# Altium PCB PenguinPi.PcbDoc
Units mil, origin at the board's own origin, x right, y up, seen from the top; angles counter-clockwise.
Board outline 2559.11 x 3103.94 mil, 2 copper layers (Top Layer, Bottom Layer); 57 components, 63 nets, 260 pads, 67 vias.
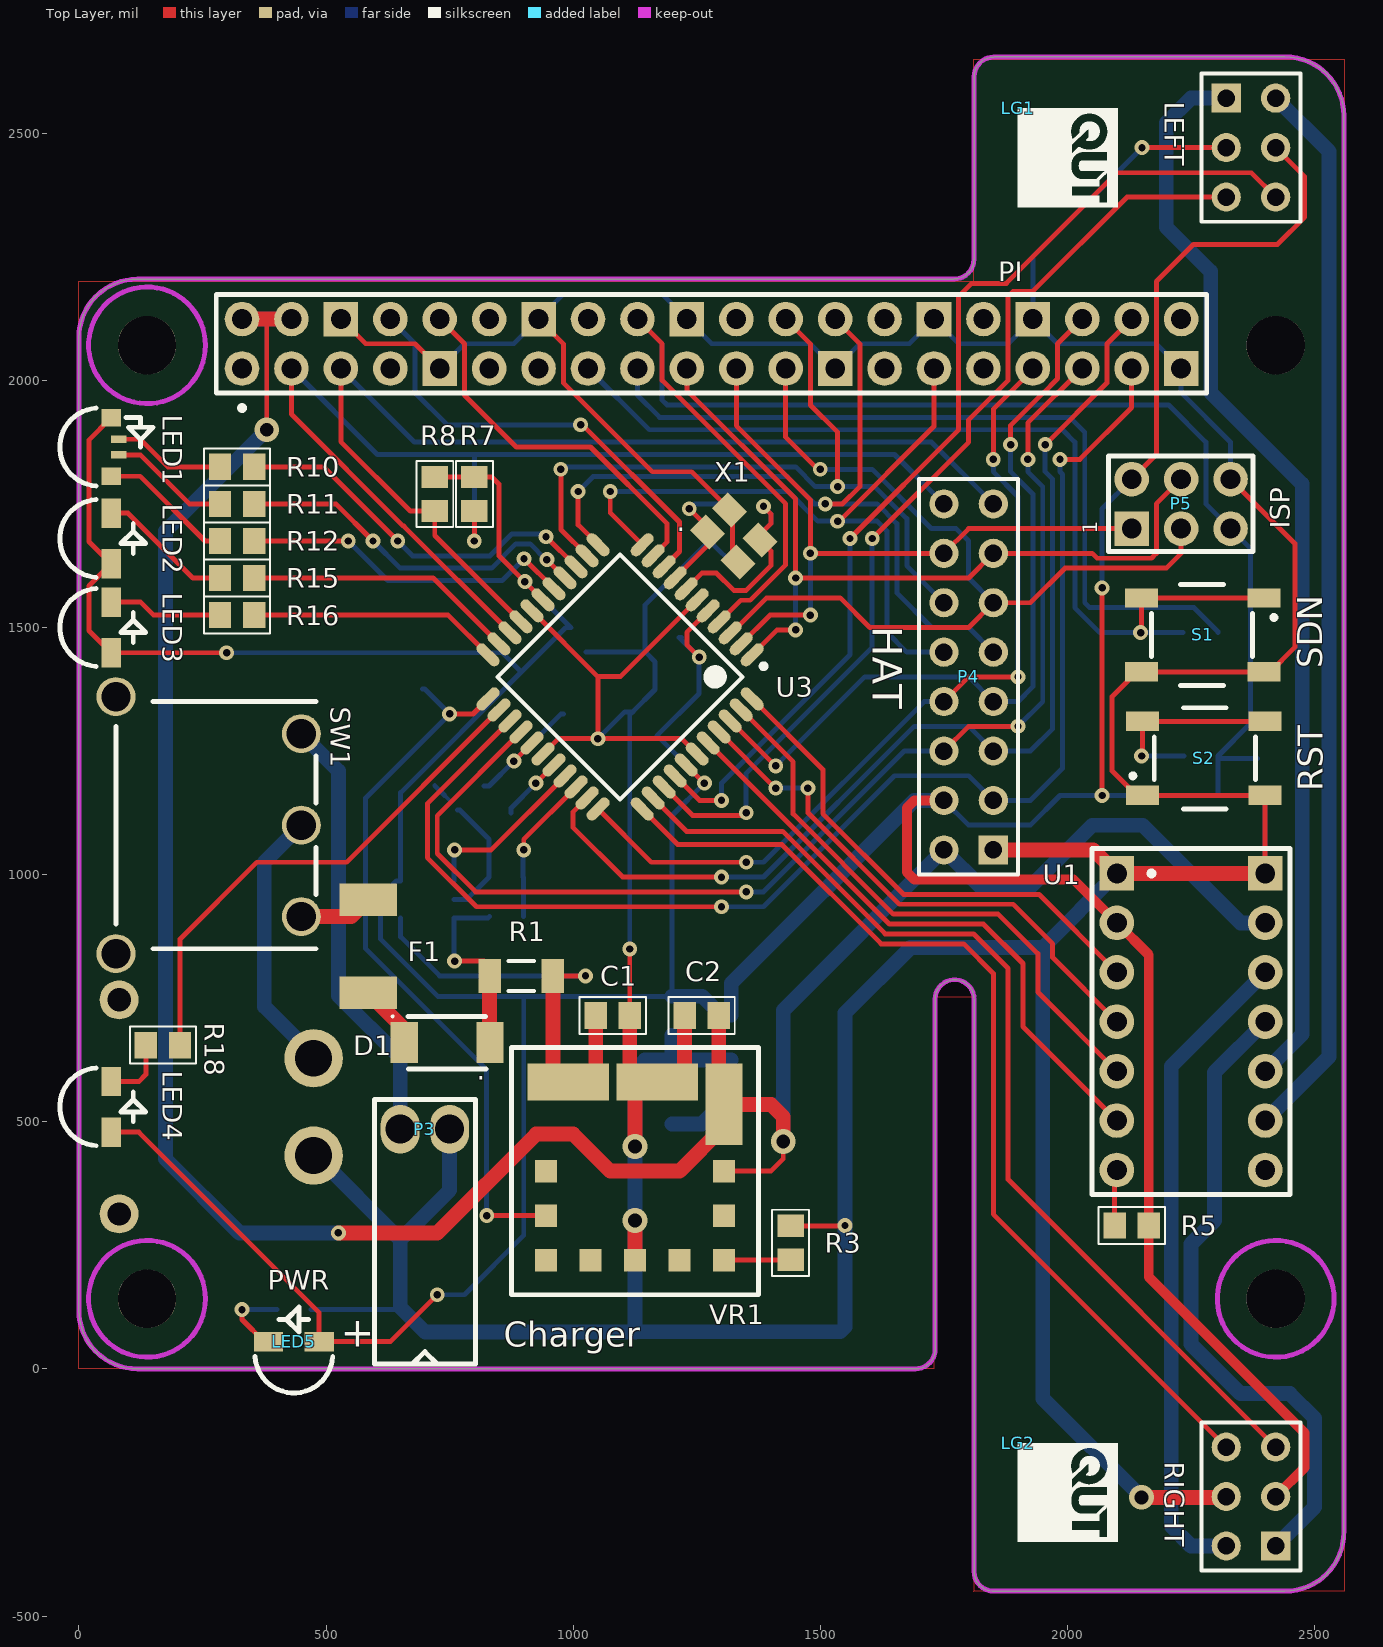
[diagram p0: Top Layer view]
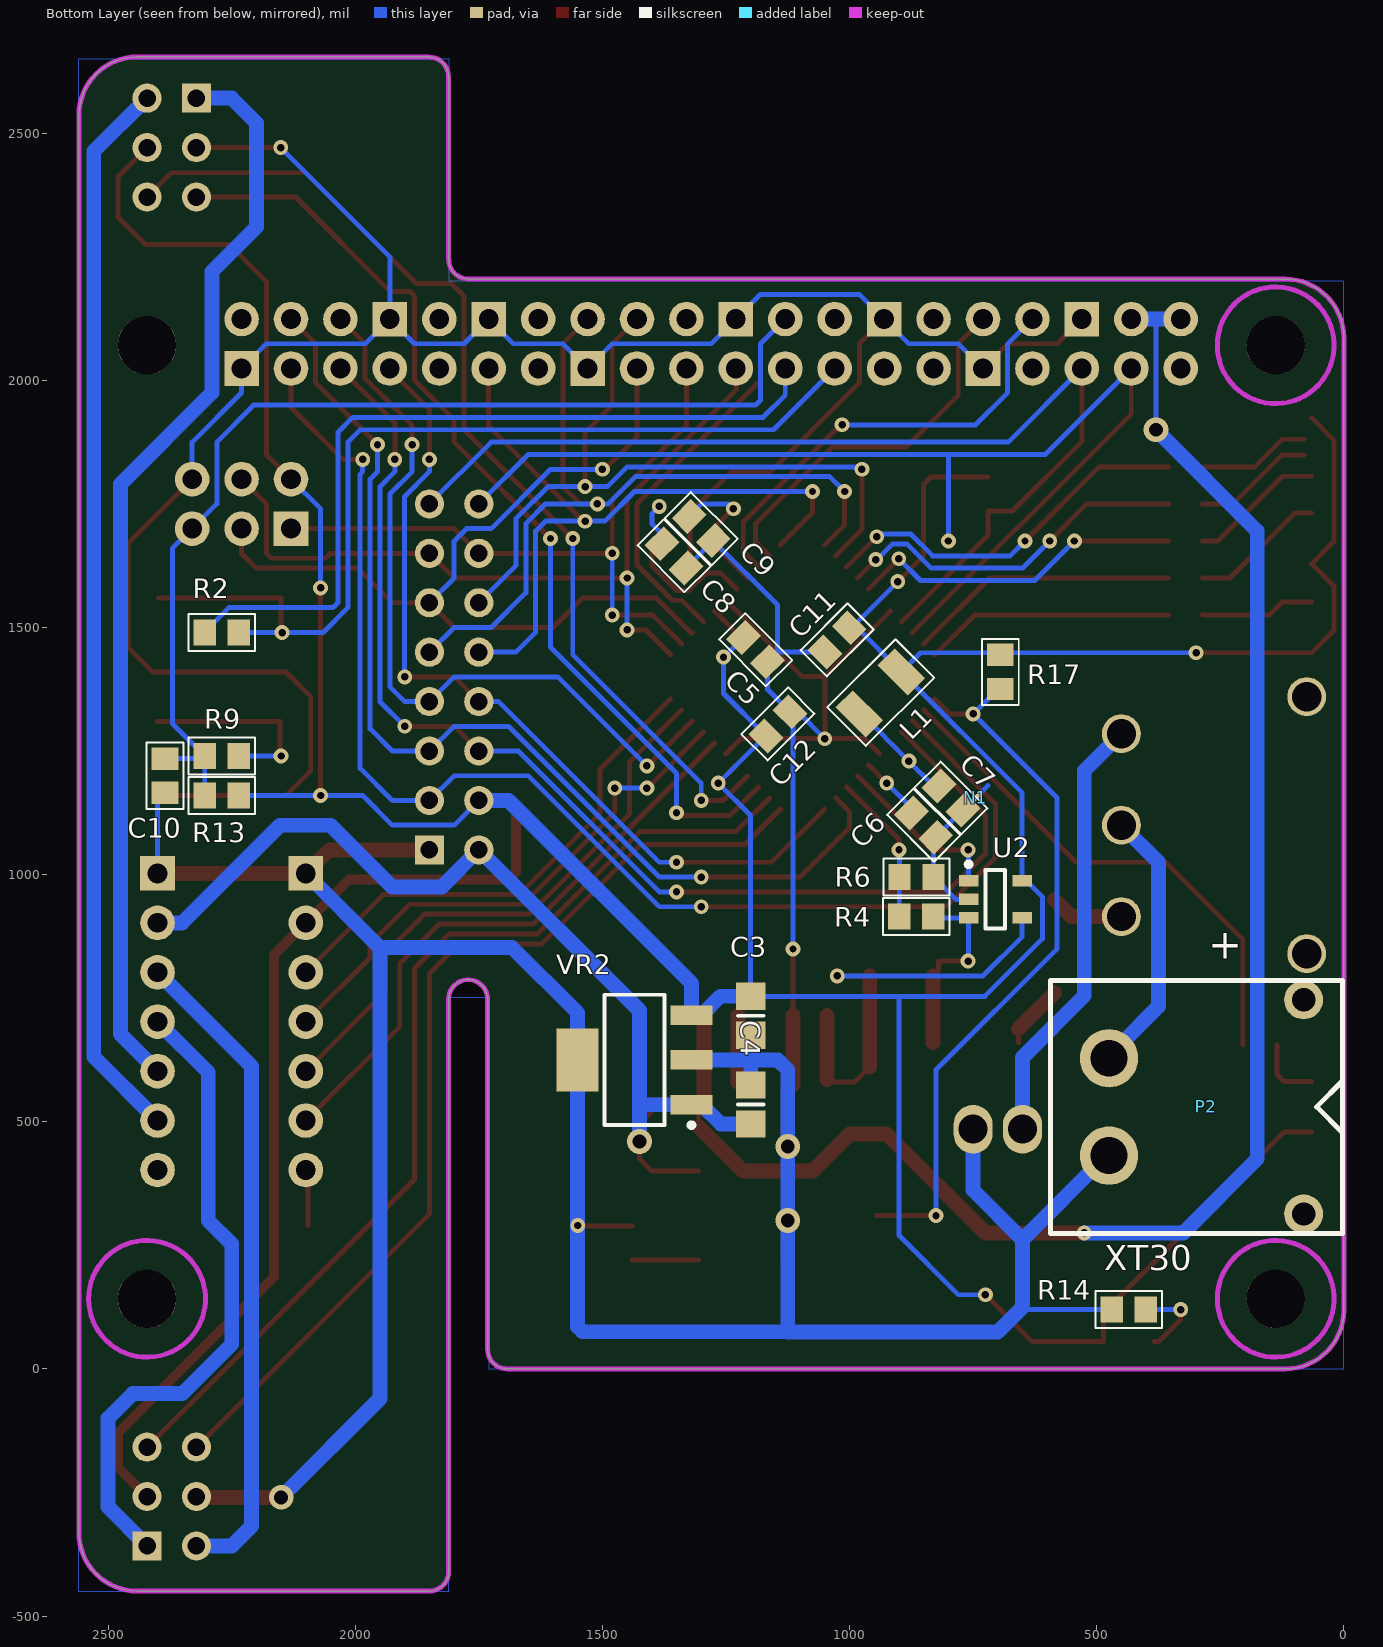
[diagram p1: Bottom Layer view, seen from below]
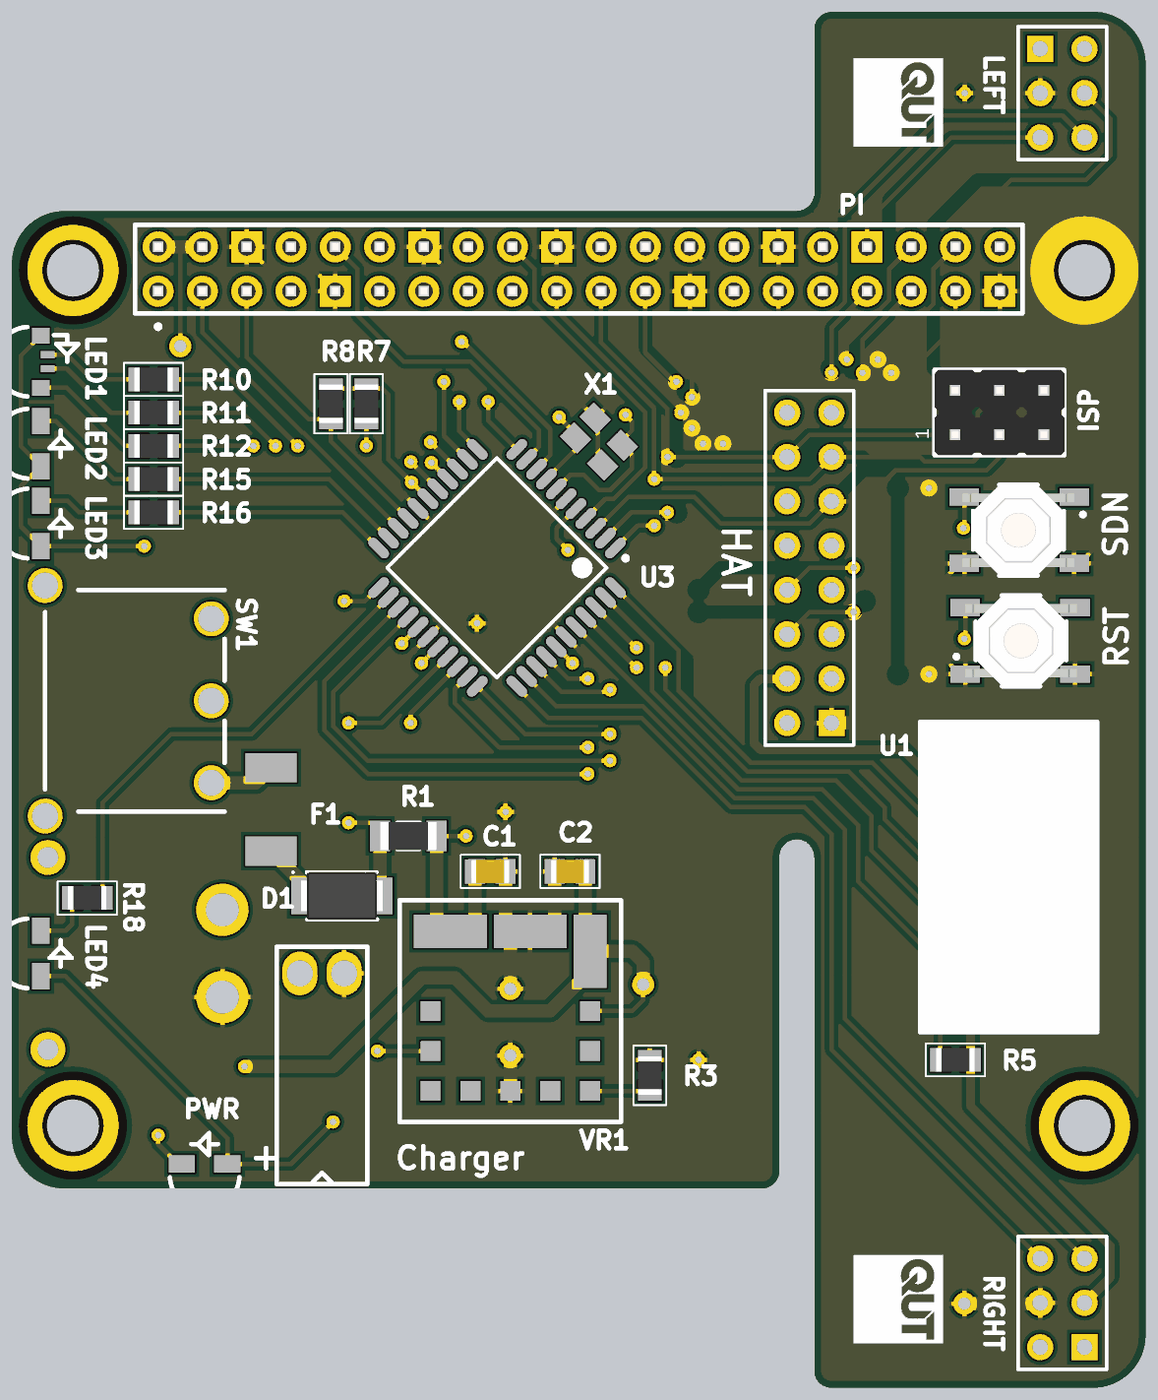
[diagram p2: 3D render of the assembled board from above, using the file's embedded part models]
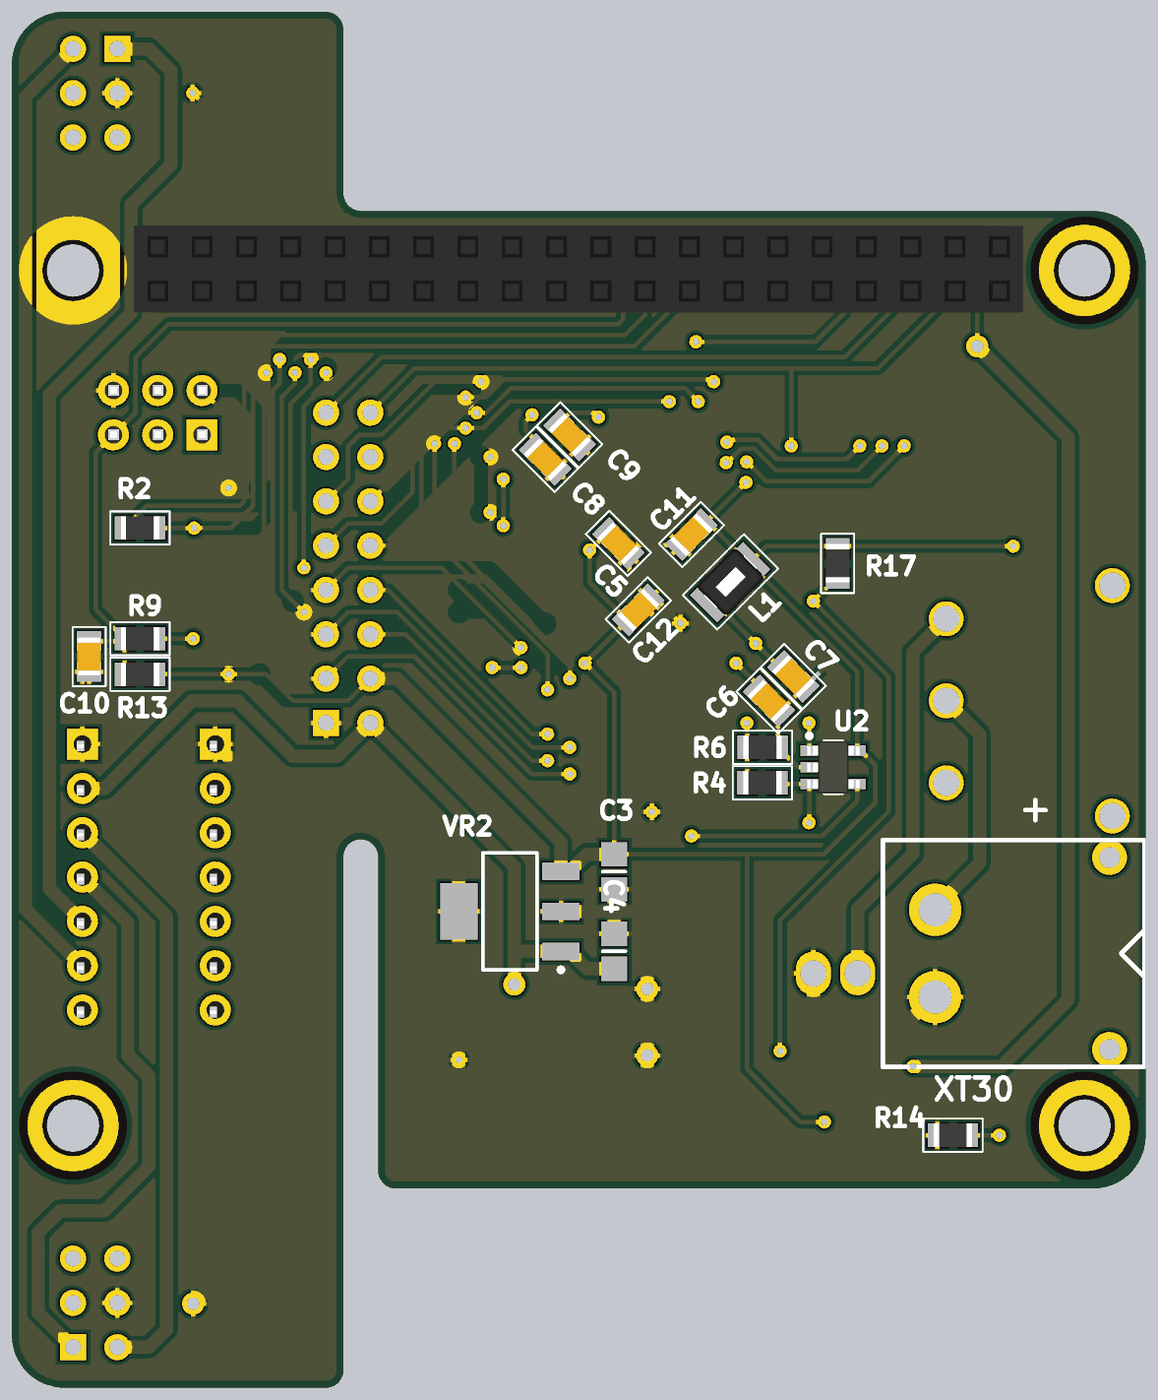
[diagram p3: 3D render of the assembled board from below, using the file's embedded part models]

## Layer stack, top to bottom
Top Solder: solder mask 0.4, Solder Resist, Dk 3.5
Top Layer: signal copper 1.4
Dielectric 1: dielectric 12.6, FR-4, Dk 4.8
Bottom Layer: signal copper 1.4
Bottom Solder: solder mask 0.4, Solder Resist, Dk 3.5

## Board outline
118.11,0 1692.91,0 ccw(c1692.91,39.37) 1732.28,39.37 1732.28,748.03 cw(c1771.65,748.03) 1811.02,748.03 1811.02,-410.24 ccw(c1850.39,-410.24) 1850.39,-449.61 2440.94,-449.61 ccw(c2440.94,-331.5) 2559.06,-331.5 2559.06,2536.22 2559.11,2536.22 ccw(c2441,2536.22) 2441,2654.33 1850.72,2654.33 1850.72,2654 ccw(c1850.72,2614.63) 1811.35,2614.63 1811.02,2614.63 1811.02,2244.42 1810.69,2244.42 cw(c1771.32,2244.42) 1771.32,2205.05 1771.32,2204.72 118.11,2204.72 ccw(c118.11,2086.61) 0,2086.61 0,118.11 ccw(c118.11,118.11)

## Design rules (kind name [scope] priority, off if disabled: settings)
Clearance [All] p1: gap=10
PolygonConnect [All] p1: connectstyle=Relief reliefconductorwidth=10 reliefentries=4 polygonreliefangle="90 Angle" airgapwidth=10
RoutingVias [All] p1: holewidth=28 width=50 viastyle="Through Hole" minholewidth=28 minwidth=50 maxholewidth=28 maxwidth=50
SolderMaskExpansion [All] p1: expansion=4
Width [All] p1: maxlimit=30 minlimit=10 preferedwidth=10
30 further rules are at their usual default settings.

## Classes and differential pairs
net class Power: MA1 MA2 MB1 MB2 NetC1_2 NetD1_1 NetD1_2 NetF1_1

## Components (designator, comment, footprint, x,y, rotation, side; value= is the part's Value field where it differs from the comment)
C1 "CAP SMD" CAPC2012X07N 1080,715 r180 top
C2 "CAP SMD" CAPC2012X07N 1260,715 r0 top
C3 "Cap" 6-0805_M 1200,714.37 r90 bottom
C4 "Cap Pol1" 6-0805_M 1200,535 r90 bottom
C5 "CAP SMD" CAPC2012X07N 1190,1455 r45 bottom
C6 "CAP SMD" CAPC2012X07N 850,1100 r45 bottom
C7 "CAP SMD" CAPC2012X07N 795,1155 r45 bottom
C8 "CAP SMD" CAPC2012X07N 1355,1645 r45 bottom
C9 "CAP SMD" CAPC2012X07N 1300,1700 r45 bottom
C10 "CAP SMD" CAPC2012X07N 2385,1200 r90 bottom
C11 "CAP SMD" CAPC2012X07N 1025,1475 r135 bottom
C12 "CAP SMD" CAPC2012X07N 1145,1305 r315 bottom
D1 "SMD DIODE" SODFL470X110-2N 745,660 r0 top
F1 "RGEF250" MF-MSMF250/16X-2 585,855 r270 top
L1 "INDUCTOR SMD" CM322522 895.18,1410 r315 bottom
LED1 "LED RGB RightAngle" "LED RGB RightAngle" 65,1865 r270 top
LED2 "" "LED YELLOW RightAngle" 65,1680 r270 top
LED3 "" "LED YELLOW RightAngle" 65,1500 r270 top
LED4 "" "LED YELLOW RightAngle" 65,530 r270 top
LED5 "PWR" "LED YELLOW RightAngle" 435,55 r0 top
LEFT "Header 3X2" HDR2X3 2321.26,2570.87 r270 top locked
LG1 "QUT_Logo" QUT_Logo 1900,2550 r270 top
LG2 "QUT_Logo" QUT_Logo 1900,-150 r270 top
N1 "NETTIE" NETTIE-SMD-5mil 739.56,1160.44 r315 bottom net-tie
P2 "XT30" "XT30 - PCB mount" 475,530 r270 bottom
P3 "Charger" "Molex SL70553 2 way" 700,485 r90 top
P4 "HAT" HDR2X8 1850,1050 r90 top locked
P5 "ISP" "Header 3x2 nonstandard" 2130,1700 r90 top locked
PI "RPi Header" "RPI 2 Header" 330,2023.94 r90 top locked
R1 "RES SMD" RESC3216X06M 895,795 r0 top
R2 "RES SMD" RESC2012X07N 2270,1490 r0 bottom
R3 "RES SMD" RESC2012X07N 1440,255 r270 top
R4 "RES SMD" RESC2012X07N 865,915 r180 bottom
R5 "RES SMD" RESC2012X07N 2130,290 r180 top
R6 "RES SMD" RESC2012X07N 864.45,995 r0 bottom
R7 "RES SMD" RESC2012X07N 800,1770 r90 top
R8 "RES SMD" RESC2012X07N 720,1770 r90 top
R9 "RES SMD" RESC2012X07N 2270,1240 r0 bottom
R10 "RES SMD" RESC2012X07N 320,1825 r0 top
R11 "RES SMD" RESC2012X07N 320,1750 r0 top
R12 "RES SMD" RESC2012X07N 320,1675 r0 top
R13 "RES SMD" RESC2012X07N 2270,1160 r180 bottom
R14 "RES SMD" RESC2012X07N 435,120 r0 bottom
R15 "RES SMD" RESC2012X07N 320,1600 r0 top
R16 "RES SMD" RESC2012X07N 320,1525 r0 top
R17 "RES SMD" RESC2012X07N 695,1410 r90 bottom
R18 "RES SMD" RESC2012X07N 170,655 r0 top
RIGHT "Header 3X2" HDR2X3 2421.26,-358.27 r90 top locked
S1 "SDN" E-SWITCH-TL3342 2398.03,1559.61 r180 top locked
S2 "RST" E-SWITCH-TL3342 2151.97,1160.39 r0 top locked
SW1 "PCB Switch" "PCB Switch" 450,1100 r270 top locked
U1 "DRV8835_CARRIER" DRV8835_CARRIER 2100,1002.36 r0 top locked
U2 "TSC888" SOT95P280X145-5N 705,950 r180 bottom
U3 "ATmega644PA-AU" 44A_L 1095,1400 r225 top locked
VR1 "Murata OKL-T/3-W12" OKL-T/3-W12 1125,400 r0 top locked
VR2 "FT_SOT223" SOT233-4N 1435,625 r0 bottom locked
X1 "20MHz" "XTAL TSX3225" 1325,1685 r315 top

## Footprints (in the part's own frame and the unit in brackets; to place one, negate y for a bottom-side part, rotate by r counter-clockwise, add the part's x,y. Pads: shape width x height; smd on the part's side, far side on the other; paste and mask are expansions set on the pad)
6-0805_M [mm] "Chip Resistor, Body 2.0x1.2mm, IPC Low Density"
  rect 1.4x1.5 smd: 1(-1,0) 2(1,0)
  silkscreen extent 0,-0.65 0,0.65, body extent -1.07,-0.7 1.07,0.7, height 0.7
44A_L [mm] "Thin QFP, 44-Leads, Body 10x10mm, Pitch 0.8mm, IPC High Density"
  oval 1.45x0.55 smd: 1(-5.6,4) 2(-5.6,3.2) 3(-5.6,2.4) 4(-5.6,1.6) 5(-5.6,0.8) 6(-5.6,0) 7(-5.6,-0.8) 8(-5.6,-1.6) 9(-5.6,-2.4) 10(-5.6,-3.2) 11(-5.6,-4) 23(5.6,-4) 24(5.6,-3.2) 25(5.6,-2.4) 26(5.6,-1.6) 27(5.6,-0.8) 28(5.6,0) 29(5.6,0.8) 30(5.6,1.6) 31(5.6,2.4) 32(5.6,3.2) 33(5.6,4)
  oval 0.55x1.45 smd: 12(-4,-5.6) 13(-3.2,-5.6) 14(-2.4,-5.6) 15(-1.6,-5.6) 16(-0.8,-5.6) 17(0,-5.6) 18(0.8,-5.6) 19(1.6,-5.6) 20(2.4,-5.6) 21(3.2,-5.6) 22(4,-5.6) 34(4,5.6) 35(3.2,5.6) 36(2.4,5.6) 37(1.6,5.6) 38(0.8,5.6) 39(0,5.6) 40(-0.8,5.6) 41(-1.6,5.6) 42(-2.4,5.6) 43(-3.2,5.6) 44(-4,5.6)
  silkscreen extent -5.72,-4.45 4.45,4.95, body extent -5,-5 5,5, height 1.2
CAPC2012X07N [mm] "Chip Capacitor, 2-Leads, Body 2.00x1.25mm, IPC Medium Density"
  rect 1.15x1.4 smd: 1(-0.875,0) 2(0.875,0)
  silkscreen extent -1.7,-0.95 1.7,0.95, body extent -1.1,-0.67 1.1,0.68, height 0.7
CM322522 [mm] "BOURNS SMD INDUCTOR"
  rect 1.25x2.2 smd: 1(0,0) 2(3.05,0)
  silkscreen extent -0.97,-1.4 3.98,1.4, body extent -0.15,-1.25 3.15,1.25, height 2.2
DRV8835_CARRIER [mil]
  rect 70x70 hole 40: 1(0,0) 14(300,0)
  round 70 hole 40: 2(0,-100) 3(0,-200) 4(0,-300) 5(0,-400) 6(0,-500) 7(0,-600) 8(300,-600) 9(300,-500) 10(300,-400) 11(300,-300) 12(300,-200) 13(300,-100)
  silkscreen extent -50,-650 350,50, body extent -49,-651 351,49, height 417
E-SWITCH-TL3342 [mm]
  rect 1.7x1 smd: 1(0,0) 2(6.3,0) 3(0,3.8) 4(6.3,3.8)
  silkscreen extent -0.6,-0.7 5.8,4.5, body extent 0,-0.7 6.4,4.5, height 1.54
HDR2X3 [mm] "Connector; Header; 3x2 Position"
  rect 1.5x1.5 hole 0.9: 1(0,0)
  round 1.5 hole 0.9: 2(0,2.54) 3(2.54,0) 4(2.54,2.54) 5(5.08,0) 6(5.08,2.54)
  silkscreen extent -1.27,-1.27 6.35,3.81
HDR2X8 [mm] "Connector; Header; 8x2 Position"
  rect 1.5x1.5 hole 0.9: 1(0,0)
  round 1.5 hole 0.9: 2(0,2.54) 3(2.54,0) 4(2.54,2.54) 5(5.08,0) 6(5.08,2.54) 7(7.62,0) 8(7.62,2.54) 9(10.16,0) 10(10.16,2.54) 11(12.7,0) 12(12.7,2.54) 13(15.24,0) 14(15.24,2.54) 15(17.78,0) 16(17.78,2.54)
  silkscreen extent -1.27,-1.27 19.05,3.81
"Header 3x2 nonstandard" [mil] "nonstandard, staggered pins"
  rect 70x70 hole 40: 1(0,0)
  round 70 hole 40: 2(100,0) 3(0,-100) 4(100,-100) 5(0,-200) 6(100,-200)
  silkscreen extent -46,-245 147,47, body extent -46,-246 147,47, height 331
"LED RGB RightAngle" [mm]
  rect 0.9x1 smd: 1(1.5,0) 2(-1.5,0)
  rect 0.4x0.8 smd: 3(-0.4,0.4) 4(0.4,0.4)
  silkscreen extent -2,-2.63 2,2.16
"LED YELLOW RightAngle" [mm]
  rect 1.5x1 smd: 1(-1.3,0) 2(1.3,0)
  silkscreen extent -2,-2.63 2,1.78
MF-MSMF250/16X-2 [mm] "SMD Fuse"
  rect 1.68x2.95 smd: 1(-2.39,0) 2(2.39,0)
"Molex SL70553 2 way" [mm] "Molex SL 70553 Series"
  oval 2.5x2 hole 1.5: 0(0,1.27) 1(0,-1.27)
  silkscreen extent -12.07,-2.6 1.52,2.6
NETTIE-SMD-5mil [mil]
  rect 10x10 smd paste+0 mask+0: 1(0,0) 2(14.76,0)
  Top Layer lines w7.87: 0.98,0 13.78,0
OKL-T/3-W12 [mil] "Murata Programmable Regulator"
  rect 45x45 smd: 1(-180,0) 5(180,0) 6(180,-180) 7(0,-180) 8(-90,-180) 9(-180,-180) 10(-180,-90) 11(180,-90) 12(90,-180)
  rect 165x75 smd: 2(-135,180) 3(45,180)
  rect 75x165 smd: 4(180,135)
  silkscreen extent -250,-250 250,250
"PCB Switch" [mm] "1101M2S3ABE2"
  round 2 hole 1.5: 0(-6.604,-9.525) 0(6.604,-9.525) 1(4.699,0) 2(0,0) 3(-4.699,0)
  silkscreen extent -6.35,-9.53 6.35,0.76
QUT_Logo [mil]
  silkscreen extent 0,0 200,202
RESC2012X07N [mm] "Chip Resistor, 2-Leads, Body 2.00x1.25mm, IPC Medium Density"
  rect 1.15x1.35 smd: 1(-0.875,0) 2(0.875,0)
  silkscreen extent -1.7,-0.95 1.7,0.95, body extent -1.1,-0.68 1.1,0.67, height 0.7
RESC3216X06M [mm] "Chip Resistor, 2-Leads, Body 3.20x1.60mm, IPC Low Density"
  rect 1.15x1.75 smd: 1(-1.625,0) 2(1.625,0)
  silkscreen extent -0.65,-0.77 0.65,0.77, body extent -1.61,-0.81 1.61,0.81, height 0.62
"RPI 2 Header" [mil]
  round 70 hole 40: 1(0,0) 2(100,0) 3(0,-100) 4(100,-100) 5(0,-200) 7(0,-300) 8(100,-300) 10(100,-400) 11(0,-500) 12(100,-500) 13(0,-600) 15(0,-700) 16(100,-700) 17(0,-800) 18(100,-800) 19(0,-900) 21(0,-1000) 22(100,-1000) 23(0,-1100) 24(100,-1100) 26(100,-1200) 27(0,-1300) 28(100,-1300) 29(0,-1400) 31(0,-1500) 32(100,-1500) 33(0,-1600) 35(0,-1700) 36(100,-1700) 37(0,-1800) 38(100,-1800) 40(100,-1900)
  rect 70x70 hole 40: 6(100,-200) 9(0,-400) 14(100,-600) 20(100,-900) 25(0,-1200) 34(100,-1600) 39(0,-1900)
  rect 70x70 hole 40 mask+4: 30(100,-1400)
  silkscreen extent -85,-1952 150,52, body extent -48,-1954 149,54, height 374
SODFL470X110-2N [mm] "SODFL, 2-Leads, Body 2.50x4.70mm, IPC Medium Density"
  rect 1.4x2.1 smd: 1(-2.2,0) 2(2.2,0)
  silkscreen extent -2.85,-1.35 2.01,1.4, body extent -2.35,-1.35 2.35,1.35, height 1.1
SOT95P280X145-5N [mm] "SOT23, 5-Leads, Body 2.90x2.80mm, Pitch 0.95mm, IPC Medium Density"
  rect 1x0.6 smd: 1(-1.375,0.95) 2(-1.375,0) 3(-1.375,-0.95) 4(1.375,-0.95) 5(1.375,0.95)
  silkscreen extent -1.5,-1.5 0.5,1.92, body extent -1.5,-1.5 1.5,1.5, height 1.45
SOT233-4N [mm] "SOT223, 4-Leads, Body 6.50x7.00mm (avg), Pitch 2.30mm, IPC Medium Density"
  rect 2.15x1 smd: 1(-2.925,2.3) 2(-2.925,0) 3(-2.925,-2.3)
  rect 2.15x3.25 smd: 4(2.925,0)
  silkscreen extent -3.05,-3.35 1.55,3.47, body extent -1.85,-3.35 1.85,3.35, height 1.8
"XT30 - PCB mount" [mm] "Amass XT30PW"
  round 2 hole 1.2: 0(-5.5,10) 0(5.5,10)
  round 3 hole 1.9: 1(2.5,0) 2(-2.5,0)
  silkscreen extent -6.5,-3 6.5,12
"XTAL TSX3225" [mm] "3.2mm x 2.5mm"
  rect 1.4x1.15 smd: 1(-1.1,-0.8) 2(1.1,-0.8) 3(1.1,0.8) 4(-1.1,0.8)

## Part data
C1 C2 C5 C6 C7 C8 C9 C10 C11 C12: "Surface mount capacitor"
C3: "Capacitor"
C4: "Polarized Capacitor (Radial)"
D1: "Surface mount Diode"
F1: "PPTC Thermal Fuse"
L1: "Surface Mount Inductor - varying sizes"
LED2 LED3 LED4 LED5: library part "LED Yellow RightAngle"
LEFT RIGHT: "Header, 3-Pin, Dual row"
P3: library part "Molex SL 70553 2way"
P4: library part "Header 8X2", "Header, 8-Pin, Dual row"
P5: library part "Header 3x2 Staggered", "3 by 2 header, staggered pin arrangement"
PI: library part "RPi 2 Header", "GPIO connector for Raspberry Pi Microcomputer"
R1 R2 R3 R4 R5 R6 R7 R8 R9 R10 R11 R12 R13 R14 R15 R16 R17 R18: "0805 surface mount resistor"
S1 S2: library part E-SWITCH-PUSHBUTTON, "TL 3342 surface mount pushbutton"
U1: "DRV8835 Motor Controller"
U2: "Curent Sense Amplifier"
U3: library part CMP-0095-00289-2, "8-bit AVR Microcontroller, 64KB Flash, 2KB EEPROM, 4KB SRAM, 44-pin TQFP, Industrial Grade (-40°C to 85°C)"
X1: library part "XTAL ABM3B"

## Free pads (board coordinates)
  round 118.11 hole 118.11 unplated mask+62.99: 0(137.8,141.73) 1(2421.26,141.73) 2(2421.26,2070.87) 3(137.8,2070.87)

## Via types
v1: diameter 30, hole 15, Top Layer to Bottom Layer, 62 vias
v2: diameter 50, hole 28, Top Layer to Bottom Layer, 5 vias

## Nets (pads, with @x,y where several pads share a name; then routed paths per layer and width w, separated by ;. In a path a pad name is that pad's centre, name@x,y a point inside that pad or via, vN(x,y) a via of type N, cw(c..) or ccw(c..) an arc to the next point about the centre after c; other vN are vias at no path point)
3V3: C3.2 C5.2 C11.2 C12.2 L1.1 LED1.2 LED2.2 LED3.2 LED4.2 LED5.2 LEFT.4 P4.4 P5.2 R5.1 R7.2 R8.2 R13.2 R17.2 RIGHT.3 U1.2 U2.5 U3.5 U3.17 U3.38 VR2.3 | length 10955.5
  Top Layer w10: LED4.2 121.18,478.82 486.18,113.82 LED5.2 630,55 v1(725,150) ; LED1.2 20,1879.06 20,1673.82 LED2.2 20,1583.82 20,1493.82 LED3.2 v1(298.82,1448.82) ; R8.2 R7.2 835.55,1804.45 850,1790 850,1645 v1(902.27,1592.73) U3.17 ; U3.38 v1(1265.46,1185) ; v1(1255,1440) 1230,1465 1230,1490 1273.17,1533.17 U3.5 ; v1(2070,1160) v1(2070,1580) ; P5.2 2180,1850 2180,2200 2255,2275 2425,2275 2480,2330 2480,2412.13 LEFT.4
  Top Layer w20: P4.4 1690,1150 1675,1135 1675,1005 1690,990 2012.36,990 U1.2 2164.45,837.91 R5.1 2164.45,185.55 2480,-130 2480,-199.53 RIGHT.3
  Bottom Layer w10: v1(298.82,1448.82) 856.36,1448.82 L1.1 ; v1(725,150) 780,150 900,270 900,753.74 ; v1(902.27,1592.73) 995.64,1499.36 984.54,1499.36 L1.1 ; C5.2@1218.9,1479.36 C5.2 1255,1438.72 1255,1366.28 C12.2 1169.82,1280.64 v1(1265.46,1185) 1200,1119.54 C3.2 900,753.74 ; VR2.3@1299.45,715.55 VR2.3 ; P4.4 1800,1100 1925,1100 1985,1160 v1(2070,1160) R13.2 ; v1(2070,1580) 2070,1740 P5.2 ; L1.1 650.87,1165.68 U2.5 642.4,987.4 610,955 610,870 726.26,753.74 900,753.74
  Bottom Layer w30: C3.2 1261.26,753.74 VR2.3@1299.45,715.55 ; VR2.3 1319.84,779.84 1690,1150 P4.4
CSENSE: U2.1 U3.30 | length 347.3
  Top Layer w10: v1(760,1050) 834.08,1050 U3.30
  Bottom Layer w10: U2.1 v1@759.13,1049.13
ENCA1: LEFT.6 U3.37 | length 2098.2
  Top Layer w10: U3.37 1255.92,1150 v1(1300,1150) ; v1(1560,1680) 1780,1900 1780,2170 1806.33,2196.33 1876.33,2196.33 2100,2420 2372.13,2420 LEFT.6
  Bottom Layer w10: v1(1300,1150) 1300,1185 1560,1445 v1(1560,1680)
ENCA2: LEFT.5 U3.36 | length 1980.7
  Top Layer w10: U3.36 1241.37,1120 1345,1120 v1(1350,1125) ; v1(1605,1680) 1800,1875 1800,1920 1880,2000 1880,2170 1890,2180 1930,2180 2120.87,2370.87 LEFT.5
  Bottom Layer w10: v1(1350,1125) 1350,1205 1605,1460 v1(1605,1680)
ENCB1: RIGHT.5 U3.35 | length 2053.6
  Top Layer w10: U3.35 1229.26,1087.57 1423.68,1087.57 1631.26,880 1810,880 1880,810 1880,382.99 RIGHT.5
ENCB2: RIGHT.6 U3.34 | length 2001.8
  Top Layer w10: U3.34 1211.43,1060.86 1422.12,1060.86 1622.97,860 1790,860 1850,800 1850,312.99 RIGHT.6
GND: C1.1 C2.1 C3.1 C4.2 C5.1 C8.1 C9.1 C10.1 C11.1 C12.1 LEFT.3 N1.1 P2.1 P3.1 P4.1 P5.6 PI.6 PI.9 PI.14 PI.20 PI.25 PI.30 PI.34 PI.39 R3.1 R14.2 RIGHT.4 S1.3 S1.4 S2.1 S2.2 U1.1 U1.14 U3.6 U3.18 U3.28 U3.39 VR1.3 VR1.7 VR2.2 VR2.4 X1.2 X1.4 | length 13926.8
  Top Layer w10: P2.1@469.45,421.02 P2.1@480,431.57 ; PI.6 580,2073.94 680,2073.94 PI.9 ; U3.18 1050,1400.46 ; PI.14 980,2073.94 980,1995 1160,1815 1239.54,1815 X1.4 1322.6,1731.94 1322.6,1642.86 X1.2 ; U3.28 970,1275 v1(1050,1275) ; VR1.3@1114.45,575 VR1.3@1125,564.45 ; C1.1 v1(1114.45,849.45) ; U3.39 1220,1275 v1(1050,1275) ; U3.6 1095.46,1400.46 1050,1400.46 ; R3.1 v1@1549.45,289.45 ; v1(2150.87,2470.87) LEFT.3 ; RIGHT.4@2319.53,-260 RIGHT.4 ; P5.6 2460,1670 2460,1460 2410,1410 S1.3 S1.4 2140,1410 2090,1360 2090,1210 2139.61,1160.39 S2.1 S2.2 U1.14 ; v1(1050,1275) 1050,1400.46
  Top Layer w30: VR1.3@1114.45,575 C1.1 ; VR1.7 v2(1125,300) ; v2(1125,450) VR1.3@1125,564.45 ; VR1.3@1225.55,580 C2.1 ; P4.1 2052.36,1050 U1.1 U1.14 ; v2(2150,-260) RIGHT.4@2319.53,-260
  Bottom Layer w10: R14.2 645,120 650,125 ; 720,1180 N1.1 ; PI.9 780,2073.94 880,2073.94 PI.14 980,2173.94 1180,2173.94 PI.20 1280,2073.94 1480,2073.94 PI.25 1580,2073.94 1680,2073.94 PI.30 1780,2073.94 1880,2073.94 PI.34 ; C11.1@1025.64,1450.64 C11.1 1145.64,1450.64 ; v1(1050,1275) 1104.36,1329.36 C12.1 ; v1(1114.45,849.45) 1114.45,1323.17 C12.1 ; C4.2@1200,569.37 C4.2 ; 1200,624.69 1200.31,625 ; C8.1 C9.1 1145.64,1545.64 1145.64,1450.64 ; v1(2150.87,2470.87) 1930,2250 PI.34 ; P5.6 2330,1875 2230,1975 PI.39 2180,2073.94 1980,2073.94 PI.34 ; C10.1 2400,1150.55 U1.14 ; C12.1 1165.64,1374.36 C5.1 1145.64,1450.64
  Bottom Layer w30: P2.1@480.67,460 480.67,430.91 650,261.57 ; P3.1 750,361.57 650,261.57 ; C4.2 1200,624.69 ; C3.1 1200,624.69 ; 1200.31,625 VR2.2 ; U1.1 1950,852.36 ; v2(2150,-260) 1950,-60 1950,852.36 ; 650,261.57 650,125 700.67,74.33 1125,74.33 1125,75 ; 1125,75 1540,75 1550,85 1550.16,85 VR2.4 1550.16,720.16 1682.36,852.36 1950,852.36 ; 1125,75 v2(1125,300) v2(1125,450) 1125,605 1144.69,624.69 1200,624.69
  other v1: 1550,290
HAT_00: P4.3 PI.37 U3.25 | length 2723.9
  Top Layer w10: U3.25 705,1143.63 705,1034.29 804.29,935 v1(1300,935) ; v1(1985,1840) 2025,1840 2130,1945 PI.37
  Bottom Layer w10: v1(1300,935) 1385,935 1650,1200 1800,1200 P4.3 1925,1150 1990,1215 1990,1810 1985,1815 v1(1985,1840)
HAT_01: P4.5 PI.38 U3.32 | length 2159.7
  Top Layer w10: U3.32 1000,1126.83 1000,1095 1100,995 v1(1300,995) ; P4.5 P4.5@1853.28,1250 ; v1(1955,1870) 2080,1995 2080,2073.94 PI.38
  Bottom Layer w10: v1(1300,995) 1385,995 1690,1300 1800,1300 P4.5 1925,1250 1970,1295 1970,1800 1955,1815 v1(1955,1870)
HAT_02: P4.7 PI.36 U3.42 | length 1580.7
  Top Layer w10: U3.42 1408.63,1220 v1(1410,1220) ; v1(1885,1870) 1885,1908.94 1950,1973.94 1950.71,1973.94 1980,2003.23 1980,2073.94 PI.36
  Bottom Layer w10: v1(1410,1220) 1590,1400 1800,1400 P4.7 1900,1350 1930,1380 1930,1770 1885,1815 v1(1885,1870)
HAT_03: P4.9 PI.26 U3.12 | length 1650.1
  Top Layer w10: v1(1010,1775) 1010,1707.71 U3.12 ; v1(1510,1750) 1545,1750 1580,1785 1580,2073.94 PI.26
  Bottom Layer w10: v1(1010,1775) 1040,1805 1433.28,1805 1488.28,1750 v1(1510,1750) 1615,1750 1655,1710 1655,1570 1725,1500 1800,1500 P4.9
HAT_04: P4.12 PI.24 U3.13 | length 1526.1
  Top Layer w10: v1(975,1820) 975,1698.17 U3.13 ; PI.24 1480,2073.94 1480,1950 1535,1895 v1(1535,1785)
  Bottom Layer w10: v1(975,1820) 980,1825 1450,1825 1490,1785 v1(1535,1785) 1610,1785 1675,1720 1675,1625 P4.12
HAT_05: P4.10 PI.29 U3.11 | length 1455.8
  Top Layer w10: v1(1075,1775) 1075,1731.8 U3.11 ; v1(1535,1715) 1538.28,1715 1730,1906.72 PI.29
  Bottom Layer w10: v1(1075,1775) 1435,1775 1495,1715 v1(1535,1715) 1615,1715 1635,1695 1635,1490 1675,1450 P4.10
HAT_06: P4.8 PI.33 U3.33 | length 1727.3
  Top Layer w10: U3.33 1158.2,1025 v1(1350,1025) ; P4.8 1800,1400 v1(1900,1400) ; v1(1850,1840) 1850,1941.72 1930,2021.72 PI.33
  Bottom Layer w10: v1(1350,1025) 1385,1025 1710,1350 P4.8 ; v1(1850,1840) 1850,1815 1900,1765 v1(1900,1400)
HAT_07: P4.6 PI.35 U3.26 | length 2464.8
  Top Layer w10: U3.26 725,1119.08 725,1042.57 802.57,965 v1(1350,965) ; P4.6 1800,1300 v1(1900,1300) ; v1(1920,1840) 1920,1913.94 PI.35
  Bottom Layer w10: v1(1350,965) 1385,965 1670,1250 P4.6 ; v1(1900,1300) 1950,1350 1950,1785 1920,1815 v1(1920,1840)
LED-B: R11.2 U3.15 | length 731.8
  Top Layer w10: R11.2 520,1750 v1(595,1675) ; v1(946.81,1637.27) U3.15
  Bottom Layer w10: v1(595,1675) 650,1620 835,1620 884.08,1669.08 912.88,1669.08 944.7,1637.27 v1(946.81,1637.27)
LED-G: R10.2 U3.14 | length 778.8
  Top Layer w10: R10.2 495,1825 v1(645,1675) ; v1@940,1688.63 v1(945,1683.63) U3.14
  Bottom Layer w10: v1(645,1675) 675,1645 831.72,1645 875.8,1689.08 939.54,1689.08 v1(945,1683.63)
LED-R: R12.2 U3.16 | length 683.6
  Top Layer w10: R12.2 v1(545,1675) ; v1(900.46,1639.08) U3.16
  Bottom Layer w10: v1(545,1675) 625,1595 856.37,1595 v1(900.46,1639.08)
LED-Y0: R15.2 U3.21 | length 550.7
  Top Layer w10: R15.2 716.83,1600 U3.21
LED-Y1: R16.2 U3.22 | length 506.6
  Top Layer w10: R16.2 747.29,1525 U3.22
LED-Y2: R18.2 U3.24 | length 1052.1
  Top Layer w10: R18.2 204.45,869.45 360,1025 541.83,1025 U3.24
MA1: LEFT.2 U1.9 | length 2166.6
  Bottom Layer w30: U1.9 2529.06,631.42 2529.06,2463.07 LEFT.2
MA2: LEFT.1 U1.10 | length 2205.4
  Bottom Layer w30: LEFT.1 2250,2570.87 2200,2520.87 2200,2310 2290,2220 2290,1975 2475,1790 2475,677.36 U1.10
MAPH: U1.6 U3.40 | length 1218.1
  Top Layer w10: U3.40 1639.54,900 1830,900 1910,820 1910,692.36 U1.6
MAPWM: U1.5 U3.43 | length 1169.9
  Top Layer w10: U3.43 1445,1228.17 1445,1122.83 1647.83,920 1860,920 1940,840 1940,762.36 U1.5
MB1: RIGHT.1 U1.11 | length 1317.5
  Bottom Layer w30: U1.11 2297.39,599.76 2297.39,300 2250,252.61 2250,50 2350,-50 2450,-50 2500,-100 2500,-279.53 RIGHT.1
MB2: RIGHT.2 U1.12 | length 1327.2
  Bottom Layer w30: RIGHT.2 2250,-358.27 2210,-318.27 2210,612.36 U1.12
MBPH: U1.4 U3.41 | length 1110.4
  Top Layer w10: U3.41 1409.08,1175 v1(1410,1175) ; v1(1475,1175) 1475,1125 1660,940 1890,940 1970,860 1970,832.36 U1.4
  Bottom Layer w10: v1(1410,1175) v1(1475,1175) ; U1.4@2087.64,690 U1.4
MBPWM: U1.3 U3.44 | length 1036.7
  Top Layer w10: U3.44 1505,1212.71 1505,1123.28 1668.28,960 1942.36,960 U1.3
  Bottom Layer w10: U1.3@2087.64,790 U1.3
MISO: P4.14 P5.1 PI.21 U3.2 | length 1395.9
  Top Layer w10: PI.21 1330,1908.28 1480,1758.28 v1(1480,1650) P4.14 1800,1700 P5.1 ; U3.2 1398.17,1525 v1(1480,1525)
  Bottom Layer w10: v1(1480,1525) v1(1480,1650)
MOSI: P4.13 P5.4 PI.19 U3.1 | length 1658.4
  Top Layer w10: PI.19 1230,1980 1450,1760 v1(1450,1600) 1800,1600 P4.13 2050,1650 2060,1640 2170,1640 2180,1650 2180,1750 P5.4 ; U3.1 1412.71,1495 v1(1450,1495)
  Bottom Layer w10: v1(1450,1495) v1(1450,1600)
NetC1_2: C1.2 R1.2 U2.4 VR1.2 | length 926.6
  Top Layer w10: VR1.2@958.98,611.02 VR1.2 1040,580 VR1.2@1045.55,585.55 ; R1.2 v1(1025,795)
  Top Layer w30: VR1.2@958.98,611.02 R1.2 ; VR1.2@1045.55,585.55 C1.2
  Bottom Layer w10: U2.4 650.87,874.13 730,795 v1(1025,795)
NetC6_2: C6.2 U3.29 | length 133.5
  Top Layer w10: v1(924.54,1185) U3.29
  Bottom Layer w10: C6.2 874.36,1134.82 v1(924.54,1185)
NetC7_2: C7.2 L1.2 U3.27 | length 273.2
  Top Layer w10: v1(880,1229.54) U3.27
  Bottom Layer w10: C7.2 829.82,1179.36 v1(880,1229.54) 975.55,1325.09 L1.2
NetC8_2: C8.2 U3.7 X1.3 | length 454.7
  Top Layer w10: U3.7 1260.46,1610 1290,1610 1325,1575 1350,1575 1400,1625 1400,1654.54 X1.3 1377.89,1687.89 1400,1710 1400,1730 v1(1385,1745)
  Bottom Layer w10: C8.2 1379.36,1689.36 1400,1710 1400,1730 v1(1385,1745)
NetC9_2: C9.2 U3.8 X1.1 | length 286.3
  Top Layer w10: U3.8 1272.11,1666.19 X1.1 1272.11,1702.89 v1(1235,1740)
  Bottom Layer w10: v1(1235,1740) 1245,1750 1298.72,1750 C9.2
NetD1_1: D1.1 F1.2 | length 131.3
  Top Layer w10: D1.1 D1.1@658.39,687.52
  Top Layer w30: F1.2 D1.1@658.39,687.52
NetD1_2: D1.2 R1.1 R4.2 U2.3 | length 389.6
  Top Layer w10: v1(760,825) 820,825 820,806.02 R1.1
  Top Layer w30: D1.2@831.02,660 R1.1
  Bottom Layer w10: v1@759.13,825 U2.3 828.15,912.6 R4.2
NetDC1_2: P3.0 SW1.3 | length 882.8
  Bottom Layer w30: SW1.3 525,1210 525,755 650,630 P3.0
NetF1_1: F1.1 SW1.1 | length 149.1
  Top Layer w30: SW1.1 550.91,915 F1.1
NetLED1_1: LED1.1 R12.1 | length 274.8
  Top Layer w10: LED1.1 124.06,1805.94 255,1675 R12.1
NetLED1_3: LED1.3 R10.1 | length 227.9
  Top Layer w10: LED1.3 124.25,1880.75 180,1825 R10.1
NetLED1_4: LED1.4 R11.1 | length 245.9
  Top Layer w10: LED1.4 124.25,1849.25 223.5,1750 R11.1
NetLED2_1: LED2.1 R15.1 | length 274.9
  Top Layer w10: LED2.1 99.37,1731.18 230.55,1600 R15.1
NetLED3_1: LED3.1 R16.1 | length 233.1
  Top Layer w10: LED3.1 125,1551.18 151.18,1525 R16.1 R16.1@284.37,1526.18
NetLED4_1: LED4.1 R18.1 | length 136
  Top Layer w10: LED4.1 121.18,581.18 135.55,595.55 R18.1
NetLED5_1: LED5.1 R14.1 | length 163
  Top Layer w10: v1(330,120) 330,100 375,55 LED5.1
  Bottom Layer w10: v1(330,120) R14.1
NetP2_2: P2.2 SW1.2 | length 535
  Bottom Layer w30: SW1.2 375,1025 375,733.43 451.57,656.85 P2.2@480.67,656.85
NetPI_15: PI.15 R2.1 S1.1 S1.2 | length 1937.2
  Top Layer w10: v1@2150,1491.57 S1.2 S1.1
  Bottom Layer w10: PI.15 1153.94,1900 1990,1900 2015,1875 2015,1540 2065.39,1489.61 v1(2148.03,1489.61) R2.1@2233.58,1489.61
NetPI_17: PI.17 R2.2 | length 1630.2
  Bottom Layer w10: PI.17 1130,1970 1175,1925 2005,1925 2035,1895 2035,1550 2045,1540 2255.98,1540 2304.45,1491.53 R2.2
NetR3_2: R3.2 VR1.6 | length 135.2
  Top Layer w10: VR1.6 1439.45,220 R3.2
NetR5_2: R5.2 U1.7 | length 114.2
  Top Layer w10: R5.2 2095.55,397.91 U1.7
NetR9_1: R9.1 S2.3 S2.4 | length 404.4
  Top Layer w10: v1(2150,1240) 2151.97,1241.97 S2.3 S2.4
  Bottom Layer w10: v1(2150,1240) R9.1
PWRG: R17.1 U3.23 VR1.10 | length 1473.2
  Top Layer w10: v1(750,1325) 797.29,1325 U3.23 ; v1(825,310) VR1.10
  Bottom Layer w10: R17.1 699.45,1375.55 v1(750,1325) 580,1155 580,850 825,605 v1(825,310)
RST: C10.2 P5.5 PI.18 R9.2 R13.1 U3.4 | length 2986
  Top Layer w10: PI.18 1180,2073.94 1180,2000 1430,1750 1430,1626.72 1358.28,1555 1339.08,1555 U3.4
  Bottom Layer w10: PI.18 1180,2073.94 1180,1960 1190,1950 2205,1950 2280,1875 2280,1750 P5.5 2370,1660 2370,1305.55 R9.2 ; R13.1 R9.2 ; C10.2 2310,1234.45 R9.2
RX: PI.8 U3.9 | length 896.9
  Top Layer w10: v1@1019.14,1909.14 1215,1713.28 1215,1653.63 U3.9
  Bottom Layer w10: PI.8 680,2073.94 680,1975 745,1910 v1@1000,1910
  other v1: 1015,1910
SCL: P4.15 PI.5 R8.1 U3.19 | length 2126.1
  Top Layer w10: PI.5 530,1875.92 670.36,1735.55 R8.1 720,1685.92 U3.19
  Bottom Layer w10: PI.5 678.94,1875 1725,1875 P4.15
SCLK: P4.11 P5.3 PI.23 U3.3 | length 1820.3
  Top Layer w10: U3.3 1320.65,1489.08 1391.57,1560 1540,1560 1600,1500 1800,1500 P4.11 1925,1550 1995,1620 2200,1620 2230,1650 P5.3 ; PI.23 1430,1885 1495,1820 v1(1500,1820)
  Bottom Layer w10: v1(1500,1820) 1605,1820 1725,1700 1775,1700 1800,1675 1800,1600 P4.11
SDA: P4.16 PI.3 R7.1 U3.20 | length 2387.7
  Top Layer w10: PI.3 430,1931.37 656.37,1705 657.43,1705 872.29,1490.14 U3.20 ; v1(800,1675) R7.1
  Bottom Layer w10: PI.3 603.94,1850 800,1850 ; v1(800,1675) 800,1850 ; P4.16 1650,1850 800,1850
SGND: C6.1 C7.1 N1.2 R6.1 U2.2 | length 254.7
  Bottom Layer w10: U2.2 785,950 R6.1 830,1071.28 C6.1 C7.1 C7.1@765.64,1130.64
TX: PI.10 U3.10 | length 769
  Top Layer w10: PI.10 780,2073.94 780,1970 885,1865 1035,1865 1190,1710 1190,1673.17 U3.10
V_DIV: R4.1 R6.2 U3.31 | length 305.3
  Top Layer w10: v1(900,1050) 900,1071.37 U3.31
  Bottom Layer w10: v1@898.9,1048.9 R6.2 899.45,994.45 R4.1
VCC: C2.2 C4.1 P4.2 PI.2 PI.4 U1.13 VR1.4 VR1.5 VR2.1 | length 5921.5
  Top Layer w10: v2(380,1900) 380,2123.94 ; VR1.4@1294.45,545.55 VR1.4 VR1.4@1305,490 ; C2.2 C2.2@1305,704.45 ; VR1.5 1400,400 1425,425 v2(1425,460)
  Top Layer w30: PI.2 380,2123.94 PI.4 ; v1(525,275) 725,275 925,475 1000,475 1075,400 1215,400 VR1.4@1305,490 ; VR1.4@1294.45,545.55 C2.2 ; VR1.4 1400,535 1425,510 v2(1425,460)
  Bottom Layer w10: v2(380,1900) 380,2123.94 ; VR2.1@1299.45,534.45 VR2.1
  Bottom Layer w30: PI.2 PI.4 ; v2(380,1900) 175,1695 175,425 325,275 v1(525,275) ; C4.1 1260.63,495.63 VR2.1@1299.45,534.45 ; VR2.1 1425,534.45 ; v2(1425,460) 1425,534.45 ; U1.13 2350,902.36 2152.36,1100 2050,1100 1925,975 1825,975 P4.2 1425,725 1425,534.45
pads on no net: P2.0 PI.1 PI.7 PI.11 PI.12 PI.13 PI.16 PI.22 PI.27 PI.28 PI.31 PI.32 PI.40 SW1.0 U1.8 VR1.1 VR1.8 VR1.9 VR1.11 VR1.12

## Polygon pours and split planes (outlines as drawn)
GND on Bottom Layer "Bottom Layer-GND" (solid, shelved, pour order 8): 150,0 0,0 0,150 0,2070 0,2200 65,2200 105,2200 140,2200 1810,2200 1810,2650 2560,2650 2560,-450 1810,-450 1811.02,-448.98 1811.02,751.97 1732.28,751.97 1730,749.68 1730,0
GND on Top Layer "Top Layer-GND" (solid, shelved, pour order 12): 150,0 0,0 0,150 0,2070 0,2200 65,2200 105,2200 140,2200 1810,2200 1810,2650 2560,2650 2560,-450 1810,-450 1811.02,-448.98 1811.02,751.97 1732.28,751.97 1730,749.68 1730,0

## Keep-outs
Keep-Out Layer:
  circle w10: c137.8,2070.87 r118.11
  circle w10: c2421.26,141.73 r118.18
  circle w10: c137.8,141.73 r118.18
  lines w10: 1771.32,2204.72 118.11,2204.72 ccw(c118.11,2086.61) 0,2086.61 0,1476.38 0,118.11 ccw(c118.11,118.11) 118.11,0 1692.91,0 ccw(c1692.91,39.37) 1732.28,39.37 1732.28,748.03 cw(c1771.65,748.03) 1811.02,748.03 1811.02,-410.24 ccw(c1850.39,-410.24) 1850.39,-449.61 2440.95,-449.61 ccw(c2440.95,-331.5) 2559.06,-331.5 2559.06,2536.22 ; 1771.32,2205.05 ccw(c1771.32,2244.42) 1810.69,2244.42 ; 1811.02,2244.42 1811.02,2614.63 ; 1811.35,2614.63 cw(c1850.72,2614.63) 1850.72,2654 ; 1850.72,2654.33 2441,2654.33 cw(c2441,2536.22) 2559.11,2536.22

## Silkscreen, mask and mechanical layers (free items; w line width, h text height)
Top Overlay:
  text "." at 1210,1695 h40
  text "." at 805,585 h40
  text "+" at 530,45 h60
Bottom Overlay:
  text "+" at 205,830 h60
Mechanical 1:
  lines w10: 1771.32,2204.72 118.11,2204.72 ccw(c118.11,2086.61) 0,2086.61 0,1476.38 0,118.11 ccw(c118.11,118.11) 118.11,0 1692.91,0 ccw(c1692.91,39.37) 1732.28,39.37 1732.28,748.03 cw(c1771.65,748.03) 1811.02,748.03 1811.02,-410.24 ccw(c1850.39,-410.24) 1850.39,-449.61 2440.94,-449.61 ccw(c2440.94,-331.5) 2559.06,-331.5 2559.06,2536.22 ; 1771.32,2205.05 ccw(c1771.32,2244.42) 1810.69,2244.42 ; 1811.02,2244.42 1811.02,2614.63 ; 1811.35,2614.63 cw(c1850.72,2614.63) 1850.72,2654 ; 1850.72,2654.33 2441,2654.33 cw(c2441,2536.22) 2559.11,2536.22

## Text inside footprints (layer, text, board x,y; h text height)
P5: Top Overlay "1" at 2070,1690 h50 r90